# EAGLE board alarm_clock (EAGLE 7.6.0)
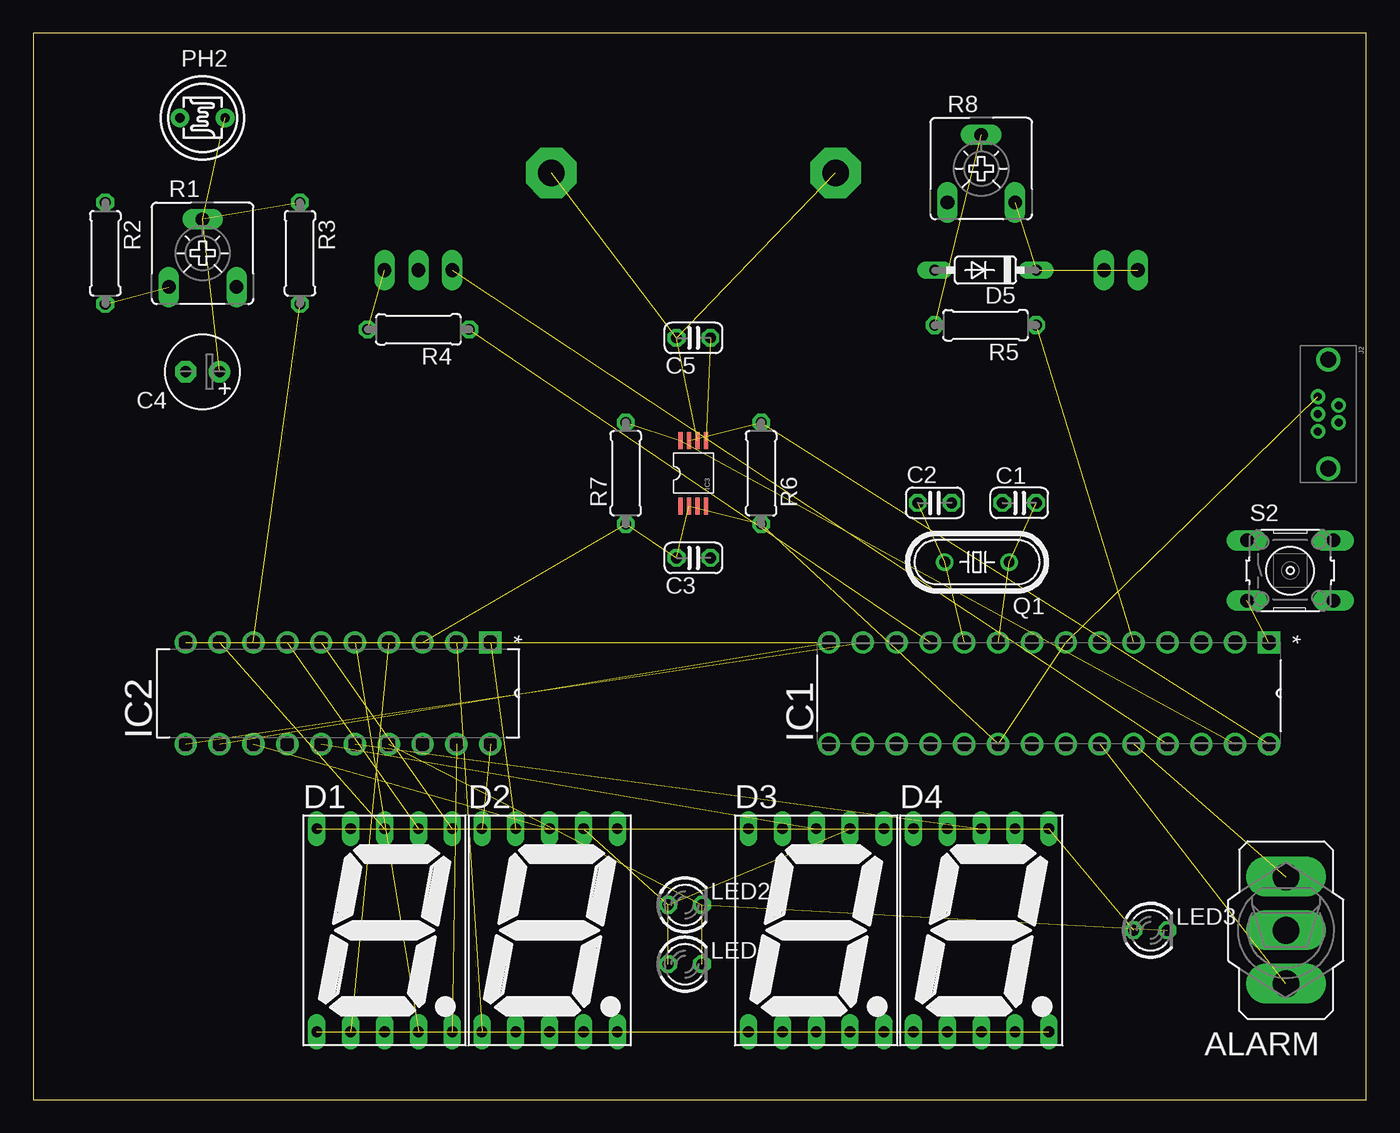
[diagram p0: board, top side]
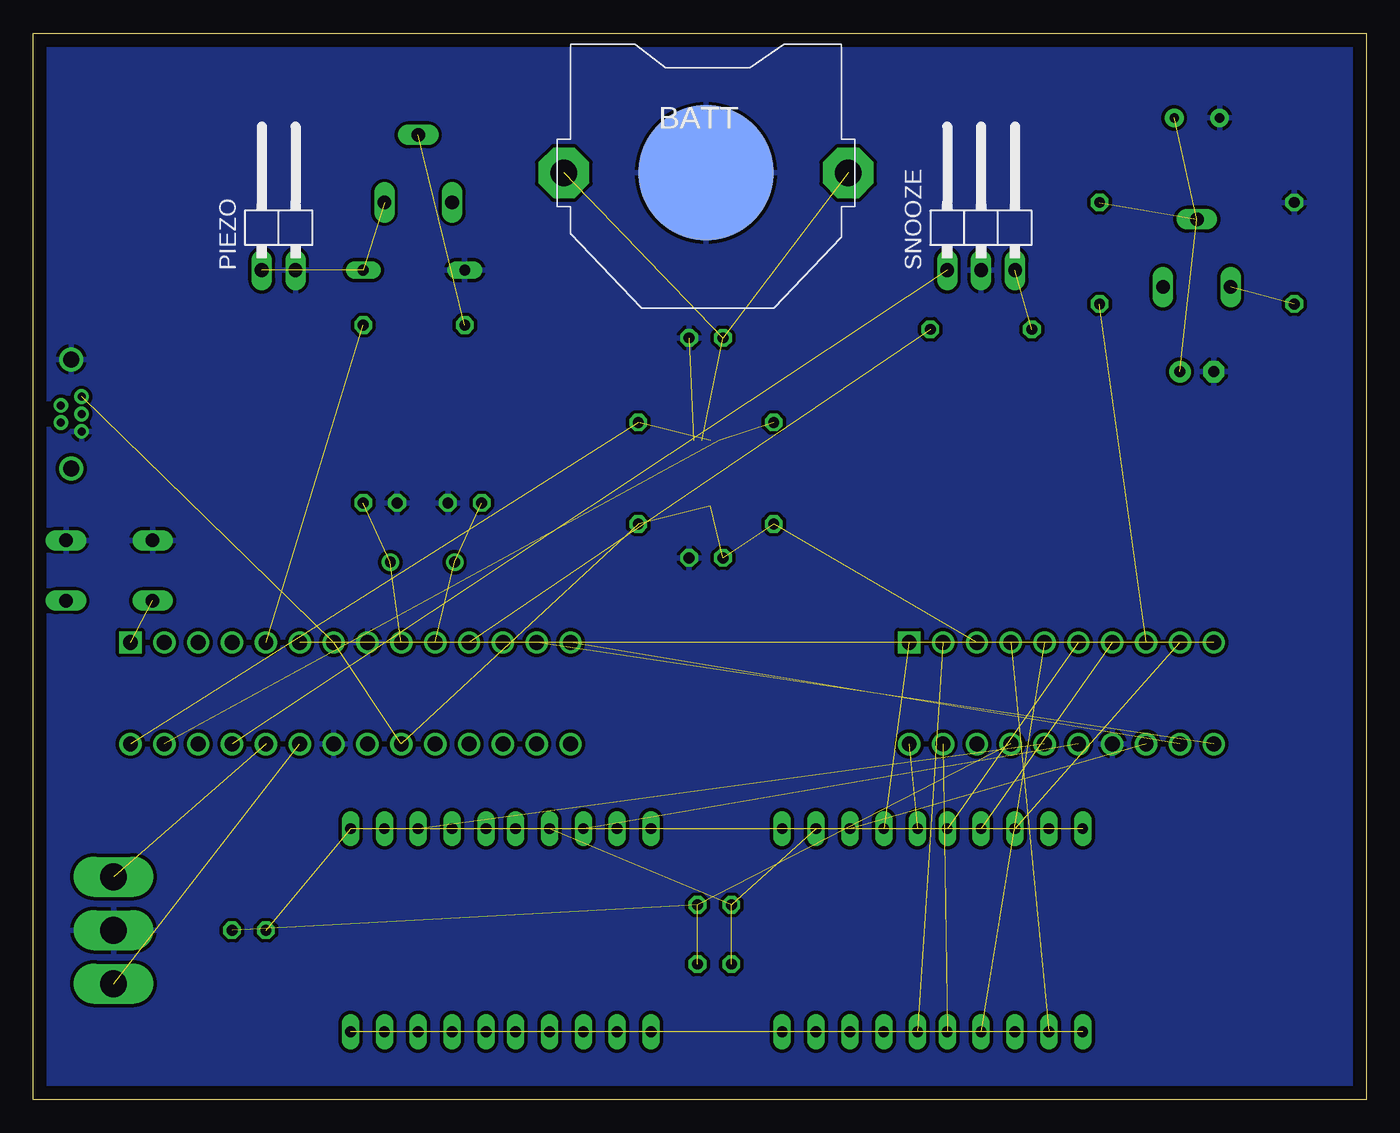
[diagram p1: board, bottom side, seen from below]

Size 100 x 80 mm. Coordinates in mm from the lower left corner, seen from the top.
Outline: 0,0 100,0 100,80 0,80 0,0
Copper layers (1*16): Top 0.035mm / dielectric 1.5mm / Bottom 0.035mm
Design rules "routed_01": minimum track width 10mil, minimum drill 24mil, track to track 10mil, track to pad 10mil, pad to pad 10mil, via to via 10mil, smd to smd 8mil, copper to edge 40mil, drill to drill 10mil, minimum pad ring 10mil, minimum via ring 8mil, stop-mask expansion 4mil, vias tented up to drill 0mil, thermal gap 10mil

## Footprints (pad centres in the part's own frame; a part is rotated, then mirrored left to right if it is on the bottom)
320-916 = drill 2.007 long: 1 0,4.013; 2 0,0; 3 0,-4.013
CR2032-THRU = drill 2 pad 3.81 octagon: +1 -10.668,0; +2 10.668,0 | smd 10.16 x 10.16: - 0,0
C025-024X044 = drill 0.813 octagon: 1 -1.27,0; 2 1.27,0
E2,5-6 = drill 0.813 pad 1.6: + -1.27,0 | drill 0.813 pad 1.6 octagon: - 1.27,0
7SEG-13 = drill 0.813 long: 1 -5.08,-7.62; 2 -2.54,-7.62; 3 0,-7.62; 4 2.54,-7.62; 5 5.08,-7.62; 6 5.08,7.62; 7 2.54,7.62; 8 0,7.62; 9 -2.54,7.62; 10 -5.08,7.62
DO35-7 = drill 0.813 long: A 3.81,0; C -3.81,0
DIP254P762X457-28 = drill 1.118 square: 1 -7.62,33.02 | drill 1.118: 2 -7.62,30.48; 3 -7.62,27.94; 4 -7.62,25.4; 5 -7.62,22.86; 6 -7.62,20.32; 7 -7.62,17.78; 8 -7.62,15.24; 9 -7.62,12.7; 10 -7.62,10.16; 11 -7.62,7.62; 12 -7.62,5.08; 13 -7.62,2.54; 14 -7.62,0; 15 0,0; 16 0,2.54; 17 0,5.08; 18 0,7.62; 19 0,10.16; 20 0,12.7; 21 0,15.24; 22 0,17.78; 23 0,20.32; 24 0,22.86; 25 0,25.4; 26 0,27.94; 27 0,30.48; 28 0,33.02
DIP254P762X457-20 = drill 1.118 square: 1 -7.62,22.86 | drill 1.118: 2 -7.62,20.32; 3 -7.62,17.78; 4 -7.62,15.24; 5 -7.62,12.7; 6 -7.62,10.16; 7 -7.62,7.62; 8 -7.62,5.08; 9 -7.62,2.54; 10 -7.62,0; 11 0,0; 12 0,2.54; 13 0,5.08; 14 0,7.62; 15 0,10.16; 16 0,12.7; 17 0,15.24; 18 0,17.78; 19 0,20.32; 20 0,22.86
DS3231-8_SO = smd 1.25 x 0.305: 1 -2.453,0.975; 2 -2.453,0.35; 3 -2.453,-0.3; 4 -2.453,-0.95; 5 2.453,-0.95; 6 2.453,-0.3; 7 2.453,0.35; 8 2.453,0.975
MICRO-B-TH = drill 0.6 pad 1: 1 -1.3,-0.775; 2 -0.65,0.775; 3 0,-0.775; 4 0.65,0.775; 5 1.3,-0.775 | drill 1.2: P$1 -4.1,0; P$2 4.1,0
LED3MM = drill 0.813 octagon: A -1.27,0; K 1.27,0
T0-46-A10XX = drill 0.7 pad 1.4: 1 -1.7,0; 2 1.7,0
1X02/90 = drill 1.016 long: 1 -1.27,-3.81; 2 1.27,-3.81
HC49/S = drill 0.813: 1 -2.413,0; 2 2.413,0
CA6V = drill 1.016 long: A -2.54,-2.54; E 2.54,-2.54; S 0,2.54
0207/7 = drill 0.813 octagon: 1 -3.81,0; 2 3.81,0
B3F-10XX = drill 1.016 long: 1 -3.251,2.261; 2 3.251,2.261; 3 -3.251,-2.261; 4 3.251,-2.261
1X03/90 = drill 1.016 long: 1 -2.54,-3.81; 2 0,-3.81; 3 2.54,-3.81

## Placement (x,y rotation side)
ALARM  S1  [320-916]  93.98,12.7 180 top
BATT  CR2032  [CR2032-THRU]  49.53,69.53 0 bottom
C1  22pF  [C025-024X044]  73.98,44.77 0 top
C2  22pF  [C025-024X044]  67.63,44.77 180 top
C3  1uF  [C025-024X044]  49.53,40.64 0 top
C4  330uF  [E2,5-6]  12.7,54.61 180 top
C5  1uF  [C025-024X044]  49.53,57.15 0 top
D1  [7SEG-13]  26.35,12.7 0 top
D2  [7SEG-13]  38.73,12.7 0 top
D3  [7SEG-13]  58.74,12.7 0 top
D4  [7SEG-13]  71.12,12.7 0 top
D5  [DO35-7]  71.44,62.23 180 top
IC1  ATMEGA328P-PU  [DIP254P762X457-28]  59.69,26.67 270 top
IC2  MC14489BPE  [DIP254P762X457-20]  11.43,26.67 270 top
IC3  DS3231  [DS3231-8_SO]  49.53,46.99 90 top
J2  [MICRO-B-TH]  97.16,51.44 270 top
LED1  Orange  [LED3MM]  48.9,10.16 0 top
LED2  Orange  [LED3MM]  48.9,14.61 0 top
LED3  Green  [LED3MM]  83.82,12.7 0 top
PH2  [T0-46-A10XX]  12.7,73.66 180 top
PIEZO  [1X02/90]  81.6,66.04 0 bottom
Q1  16MHz  [HC49/S]  70.8,40.32 180 top
R1  10kΩ  [CA6V]  12.7,63.5 0 top
R2  220Ω  [0207/7]  5.4,63.5 270 top
R3  220Ω  [0207/7]  20,63.5 270 top
R4  220Ω  [0207/7]  28.89,57.78 180 top
R5  1.5kΩ  [0207/7]  71.44,58.1 180 top
R6  220Ω  [0207/7]  54.61,46.99 90 top
R7  220Ω  [0207/7]  44.45,46.99 90 top
R8  10KΩ  [CA6V]  71.12,69.85 0 top
S2  [B3F-10XX]  94.3,39.69 0 top
SNOOZE  [1X03/90]  28.89,66.04 0 bottom

## Library data of the parts
ALARM = switch
BATT = adafruit; MF: KEYSTONE; MPN: 1066..; OC_FARNELL: 2293258
C1-C5 R2-R7 = rcl; OC_FARNELL: unknown
D1-D4 = special; OC_FARNELL: unknown
D5 = diode; OC_FARNELL: unknown
IC1 = Atmel_By_element14_Batch_1-00; MF: ATMEL; MPN: ATMEGA328P-PU; OC_FARNELL: 1715487; OC_NEWARK: 15R0268; PACKAGE: PDIP-28; SUPPLIER: Atmel
IC2 = MC14489BPE; MPN: MC14489BPE; OC_FARNELL: 1457137; OC_NEWARK: 62K4874; PACKAGE: DIP-20; SUPPLIER: FREESCALE SEMICONDUCTOR
IC3 = ds3231
J2 = SparkFun-Connectors
LED1 LED2 = led; MF: MULTICOMP; MPN: MCL053HAD/12; OC_FARNELL: 1581228
LED3 = led; MF: KINGBRIGHT; MPN: L-1503GC; OC_FARNELL: 2335730
PH2 = photo-elements; OC_FARNELL: unknown
PIEZO = pinhead; OC_FARNELL: unknown
Q1 = crystal; MF: MULTICOMP; MPN: HC49SM-3.6864-30-50-60-16-ATF; OC_FARNELL: 1667008; OC_NEWARK: unknown
R1 R8 = pot; OC_FARNELL: unknown
S2 = switch-omron; MPN: B3F-1000; OC_FARNELL: 176432; OC_NEWARK: 36M3542
SNOOZE = pinhead

## Nets
A: D1.7 D2.7 D3.7 D4.7 IC2.7 LED1.A LED2.A
B: D1.6 D2.6 D3.6 D4.6 IC2.6 LED3.A
C: D1.4 D2.4 D3.4 D4.4 IC2.5
CLK: IC1.13 IC2.11
D: D1.2 D2.2 D3.2 D4.2 IC2.4
D1: D1.8 IC2.9
D2: D2.8 IC2.13
D3: D3.8 IC2.15
D4: D4.8 IC2.16
DATA: IC1.14 IC2.12
E: D1.1 D2.1 D3.1 D4.1 IC2.2
EN: IC1.6 IC2.10
F: D1.9 D2.9 D3.9 D4.9 IC2.1
G: D1.10 D2.10 D3.10 D4.10 IC2.20
GND: ALARM.2 BATT.- C1.1 C2.1 C3.2 C4.- C5.2 D5.A IC1.8 IC1.22 IC2.14 IC3.5 J2.5 J2.P$1 PH2.2 PIEZO.2 R2.1 S2.1 S2.2 SNOOZE.2
LEDS: IC2.17 LED1.K LED2.K LED3.K
N$1: R1.A R2.2
N$2: R4.2 SNOOZE.3
N$4: R5.2 R8.S
N$5: ALARM.1 IC1.23
N$6: ALARM.3 IC1.24
N$9: IC1.25 SNOOZE.1
N$14: D5.C PIEZO.1 R8.E
N$18: C2.2 IC1.10 Q1.2
N$19: C1.2 IC1.9 Q1.1
N$21: C4.+ PH2.1 R1.S R3.1
P: D1.5 D2.5 D3.5 D4.5 IC2.19
PZ: IC1.5 R5.1
RESET: IC1.1 S2.3
RX: IC2.8 R3.2
SCL: IC1.27 IC3.8 R7.2
SDA: IC1.28 IC3.7 R6.2
SNZ: IC1.11 R4.1
VBAT: BATT.+1 BATT.+2 C5.1 IC3.6
VCC: C3.1 IC1.7 IC1.20 IC2.3 IC3.2 J2.1 R6.1 R7.1

## Tracks (layer width: path | path; a pad name or v marks a point on that pad's centre or on a via)
A  (6 unrouted)
B  (5 unrouted)
C  (4 unrouted)
CLK  (1 unrouted)
D  (4 unrouted)
D1  (1 unrouted)
D2  (1 unrouted)
D3  (1 unrouted)
D4  (1 unrouted)
DATA  (1 unrouted)
E  (4 unrouted)
EN  (1 unrouted)
F  (4 unrouted)
G  (4 unrouted)
GND  (1 unrouted)
  pour Bottom: 0,80.01 0,0 100.33,0 100.33,80.01
LEDS  (3 unrouted)
N$1  (1 unrouted)
N$2  (1 unrouted)
N$4  (1 unrouted)
N$5  (1 unrouted)
N$6  (1 unrouted)
N$9  (1 unrouted)
N$14  (2 unrouted)
N$18  (2 unrouted)
N$19  (2 unrouted)
N$21  (3 unrouted)
P  (4 unrouted)
PZ  (1 unrouted)
RESET  (1 unrouted)
RX  (1 unrouted)
SCL  (2 unrouted)
SDA  (2 unrouted)
SNZ  (1 unrouted)
VBAT  (3 unrouted)
VCC  (7 unrouted)